# EAGLE board Luxeon_Turn_Panel (EAGLE 6.4)
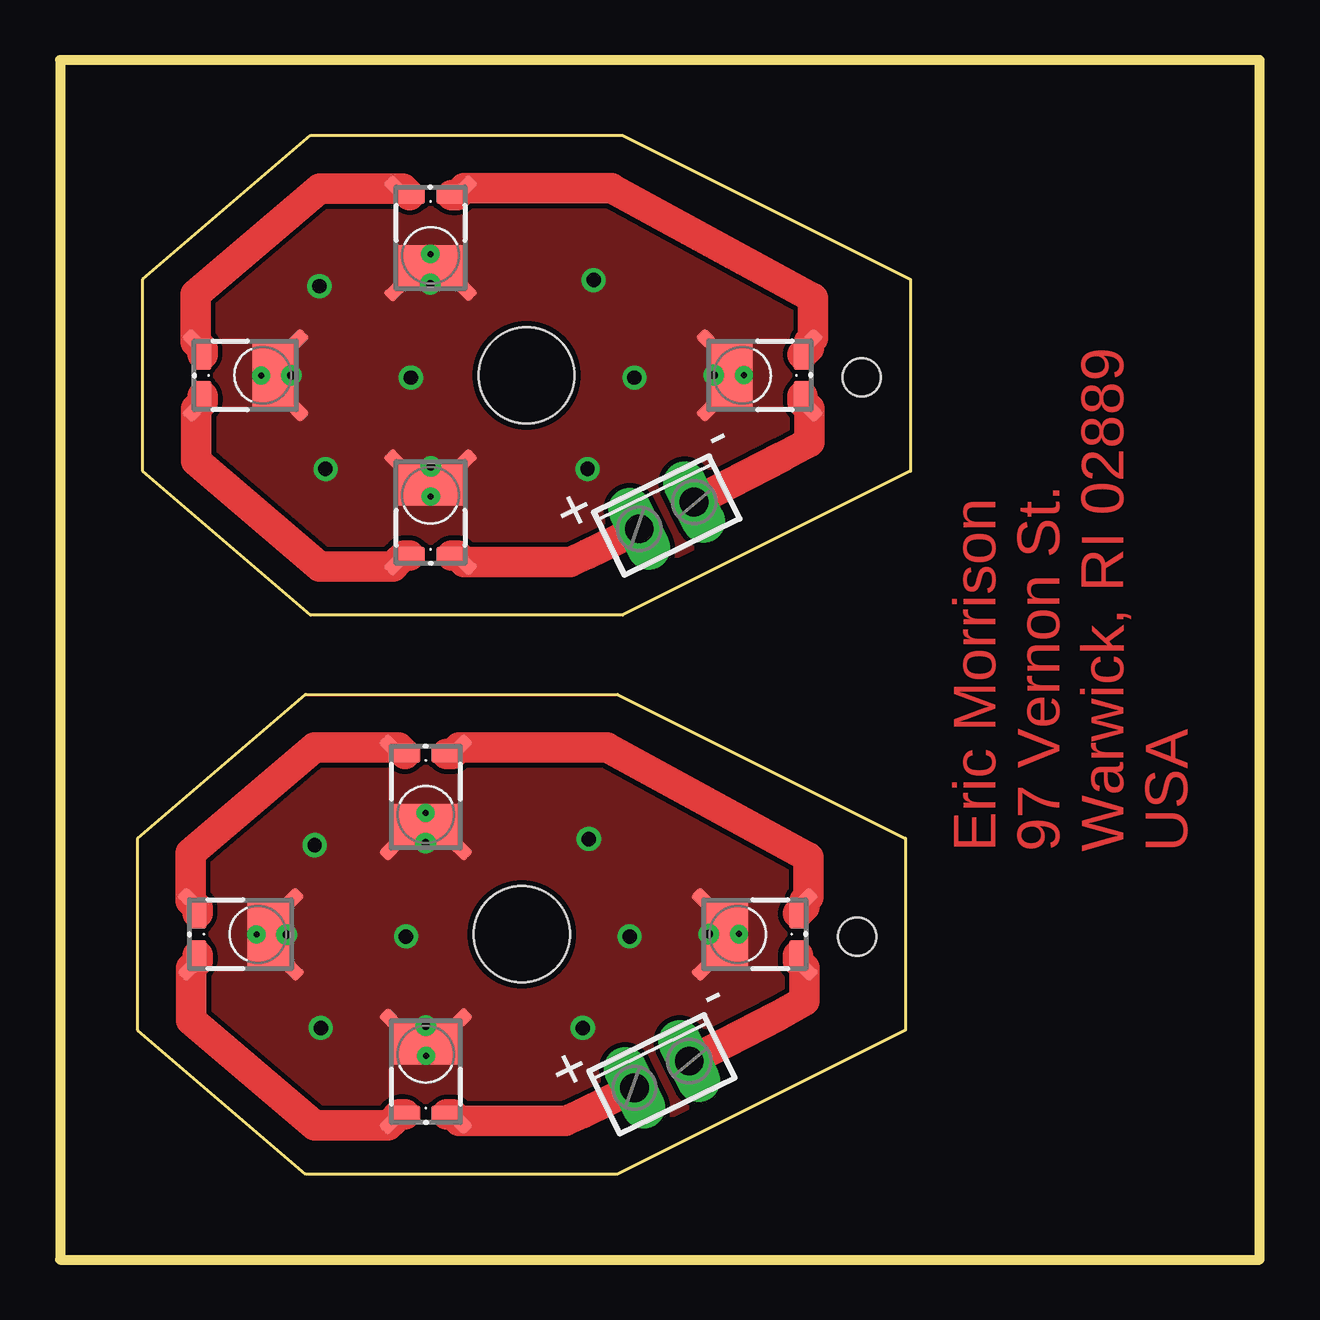
[diagram p0: board, top side]
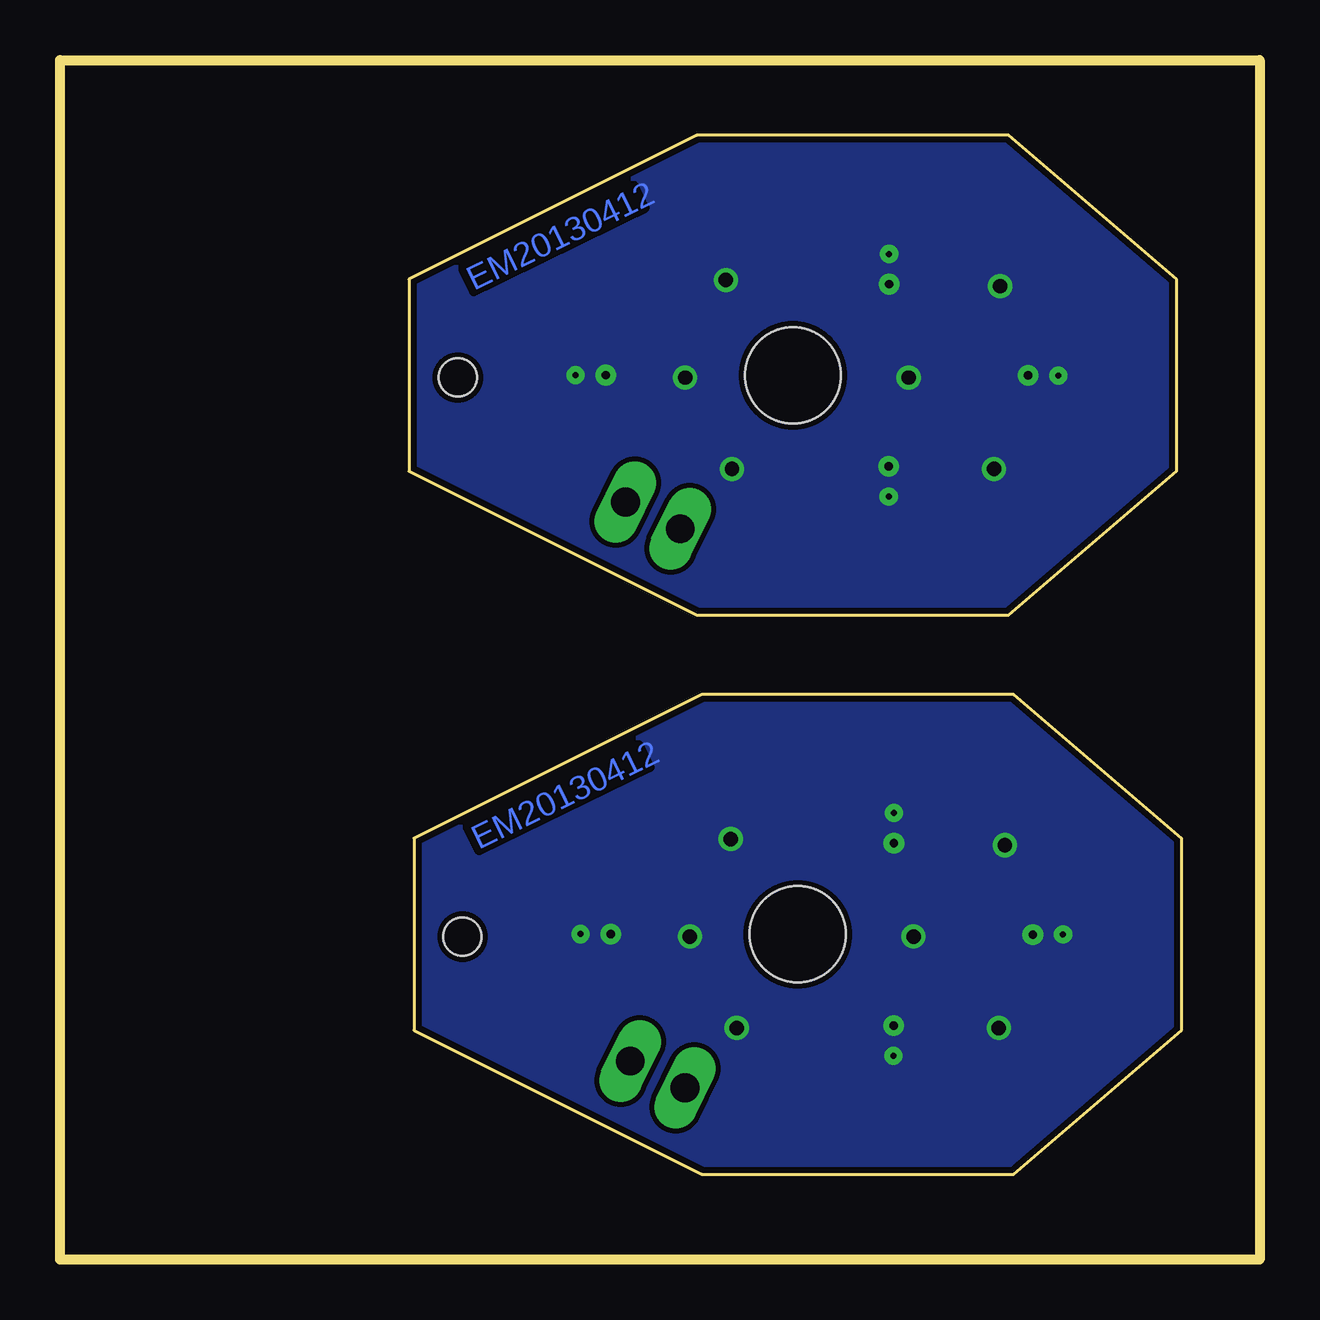
[diagram p1: board, bottom side, seen from below]

Size 50 x 50 mm. Coordinates in mm from the lower left corner, seen from the top.
Outline: 10.25,3.56 3.25,9.56 3.25,17.56 10.25,23.56 23.25,23.56 35.25,17.56 35.25,9.56 23.25,3.56 10.25,3.56
Outline: 0,0 50,0 50,50 0,50 0,0
Outline: 10.45,26.86 3.45,32.86 3.45,40.86 10.45,46.86 23.45,46.86 35.45,40.86 35.45,32.86 23.45,26.86 10.45,26.86
Copper layers (1*16): Top 0.035mm / dielectric 1.5mm / Bottom 0.035mm
Design rules "default *": minimum track width 10mil, minimum drill 24mil, track to track 8mil, track to pad 8mil, pad to pad 8mil, via to via 8mil, smd to smd 8mil, copper to edge 10mil, drill to drill 10mil, minimum pad ring 10mil, minimum via ring 8mil, stop-mask expansion 4mil, vias tented up to drill 0mil, thermal gap 10mil
Holes 4 mm at 19.25,13.56 19.45,36.86
Holes 1.59 mm at 33.22,13.46 33.42,36.76

## Footprints (pad centres in the part's own frame; a part is rotated, then mirrored left to right if it is on the bottom)
LUXEON_REBEL = smd 1.26 x 0.73: A 0.87,-2.51; C -0.87,-2.51 | smd 1.1 x 0.57 rotated 315: A@1 1.39,-2.78 | smd 1.1 x 0.57 rotated 225: C@1 -1.39,-2.79 | smd 2.86 x 1.83: TH 0.01,0.49 | smd 1.1 x 0.57 rotated 135: TH@1 -1.39,1.37 | smd 1.1 x 0.57 rotated 45: TH@2 1.39,1.38 | drill 0.25 pad 0.35: TH@3 0.01,-0.06 | drill 0.35 pad 0.5: TH@4 0.01,1.2
2POL254 = drill 1.2 long: 1 -1.27,0; 2 1.27,0

## Placement (x,y rotation side)
LED1  LUXEON_REBEL  [LUXEON_REBEL]  28.25,13.56 90 top
LED2  LUXEON_REBEL  [LUXEON_REBEL]  15.25,18.56 180 top
LED3  LUXEON_REBEL  [LUXEON_REBEL]  8.25,13.56 270 top
LED4  LUXEON_REBEL  [LUXEON_REBEL]  15.25,8.56 0 top
LED5  LUXEON_REBEL  [LUXEON_REBEL]  28.45,36.86 90 top
LED6  LUXEON_REBEL  [LUXEON_REBEL]  15.45,41.86 180 top
LED7  LUXEON_REBEL  [LUXEON_REBEL]  8.45,36.86 270 top
LED8  LUXEON_REBEL  [LUXEON_REBEL]  15.45,31.86 0 top
X1  [2POL254]  25.09,7.71 26 top
X2  [2POL254]  25.29,31.01 26 top

## Library data of the parts
LED1-LED8 = led
X1 X2 = con-phoenix-254; OC_FARNELL: unknown; OC_NEWARK: unknown

## Nets
N$1: LED5.A LED5.A@1 LED6.C LED6.C@1
N$2: LED1.A LED1.A@1 LED2.C LED2.C@1
N$3: LED2.A LED2.A@1 LED3.C LED3.C@1
N$4: LED3.A LED3.A@1 LED4.C LED4.C@1
N$5: LED6.A LED6.A@1 LED7.C LED7.C@1
N$6: LED7.A LED7.A@1 LED8.C LED8.C@1
THERMAL: LED1.TH LED1.TH@1 LED1.TH@2 LED1.TH@3 LED1.TH@4 LED2.TH LED2.TH@1 LED2.TH@2 LED2.TH@3 LED2.TH@4 LED3.TH LED3.TH@1 LED3.TH@2 LED3.TH@3 LED3.TH@4 LED4.TH LED4.TH@1 LED4.TH@2 LED4.TH@3 LED4.TH@4
THERMAL1: LED5.TH LED5.TH@1 LED5.TH@2 LED5.TH@3 LED5.TH@4 LED6.TH LED6.TH@1 LED6.TH@2 LED6.TH@3 LED6.TH@4 LED7.TH LED7.TH@1 LED7.TH@2 LED7.TH@3 LED7.TH@4 LED8.TH LED8.TH@1 LED8.TH@2 LED8.TH@3 LED8.TH@4
V+: LED4.A LED4.A@1 X1.1
V+1: LED8.A LED8.A@1 X2.1
V-: LED1.C LED1.C@1 X1.2
V-1: LED5.C LED5.C@1 X2.2

## Tracks (layer width: path | path; a pad name or v marks a point on that pad's centre or on a via)
N$1
  Top 1.27: LED6.C 16.56,44.37 LED6.C@1 23,44.65 23.01,44.64 31.39,40.06 31.39,38.41 LED5.A@1 31.23,38 LED5.A
N$2
  Top 1.27: LED2.C 16.36,21.07 LED2.C@1 22.8,21.35 22.81,21.34 31.19,16.76 31.19,15.11 LED1.A@1 31.03,14.7 LED1.A
N$3
  Top 1.27: LED3.C 5.74,14.67 LED3.C@1 5.46,16.94 10.61,21.34 LED2.A@1 14.11,21.34 LED2.A
N$4
  Top 1.27: LED4.C 14.14,6.05 LED4.C@1 13.68,5.59 10.61,5.59 5.47,9.97 LED3.A@1 5.74,12.44 LED3.A
N$5
  Top 1.27: LED7.C 5.94,37.97 LED7.C@1 5.66,40.24 10.81,44.64 LED6.A@1 14.31,44.64 LED6.A
N$6
  Top 1.27: LED8.C 14.34,29.35 LED8.C@1 13.88,28.89 10.81,28.89 5.67,33.27 LED7.A@1 5.94,35.74 LED7.A
THERMAL  (via drill 0.6)
  other vias: 10.61,17.27 22.04,17.53 14.42,13.46 10.87,9.65 23.74,13.46 21.79,9.65
  pour Top: 5.28,10.67 5.28,17.02 10.61,22.1 23.31,22.1 32.97,16.51 32.97,9.65 23.06,4.83 10.87,4.57
  pour Bottom: 2.23,8.89 2.23,18.29 9.85,24.89 23.57,24.89 36.52,18.54 36.52,9.14 23.57,2.54 9.85,2.54
THERMAL1  (via drill 0.6)
  other vias: 10.81,40.57 22.24,40.83 14.62,36.76 11.07,32.95 23.94,36.76 21.99,32.95
  pour Top: 5.48,33.97 5.48,40.32 10.81,45.4 23.51,45.4 33.17,39.81 33.17,32.95 23.26,28.13 11.07,27.87
  pour Bottom: 2.43,32.19 2.43,41.59 10.05,48.19 23.77,48.19 36.72,41.84 36.72,32.44 23.77,25.84 10.05,25.84
V+
  Top 1.27: LED4.A 16.37,6.05 LED4.A@1 21.07,5.78 21.79,6.1 X1.1
V+1
  Top 1.27: LED8.A 16.57,29.35 LED8.A@1 21.27,29.08 21.99,29.4 X2.1
V-
  Top 1.27: LED1.C 30.76,12.45 LED1.C@1 31.04,10.78 29.92,10.16 X1.2
V-1
  Top 1.27: LED5.C 30.96,35.75 LED5.C@1 31.24,34.08 30.12,33.46 X2.2

## Text on the board
Top: Eric Morrison / 97 Vernon St. / Warwick, RI 02889 / USA
Bottom: EM20130412 | EM20130412
tPlace: - | + | - | +